# Altium PCB Receiver_PCB.PcbDoc
Units mm, origin at the board's own origin, x right, y up, seen from the top; angles counter-clockwise.
Board outline 89.03 x 91.44 mm, 2 copper layers (Top Layer, Bottom Layer), stack 1.271 mm thick; 15 components, 42 nets, 110 pads, 17 vias.
Unrouted connection lines stored in the file: 1.
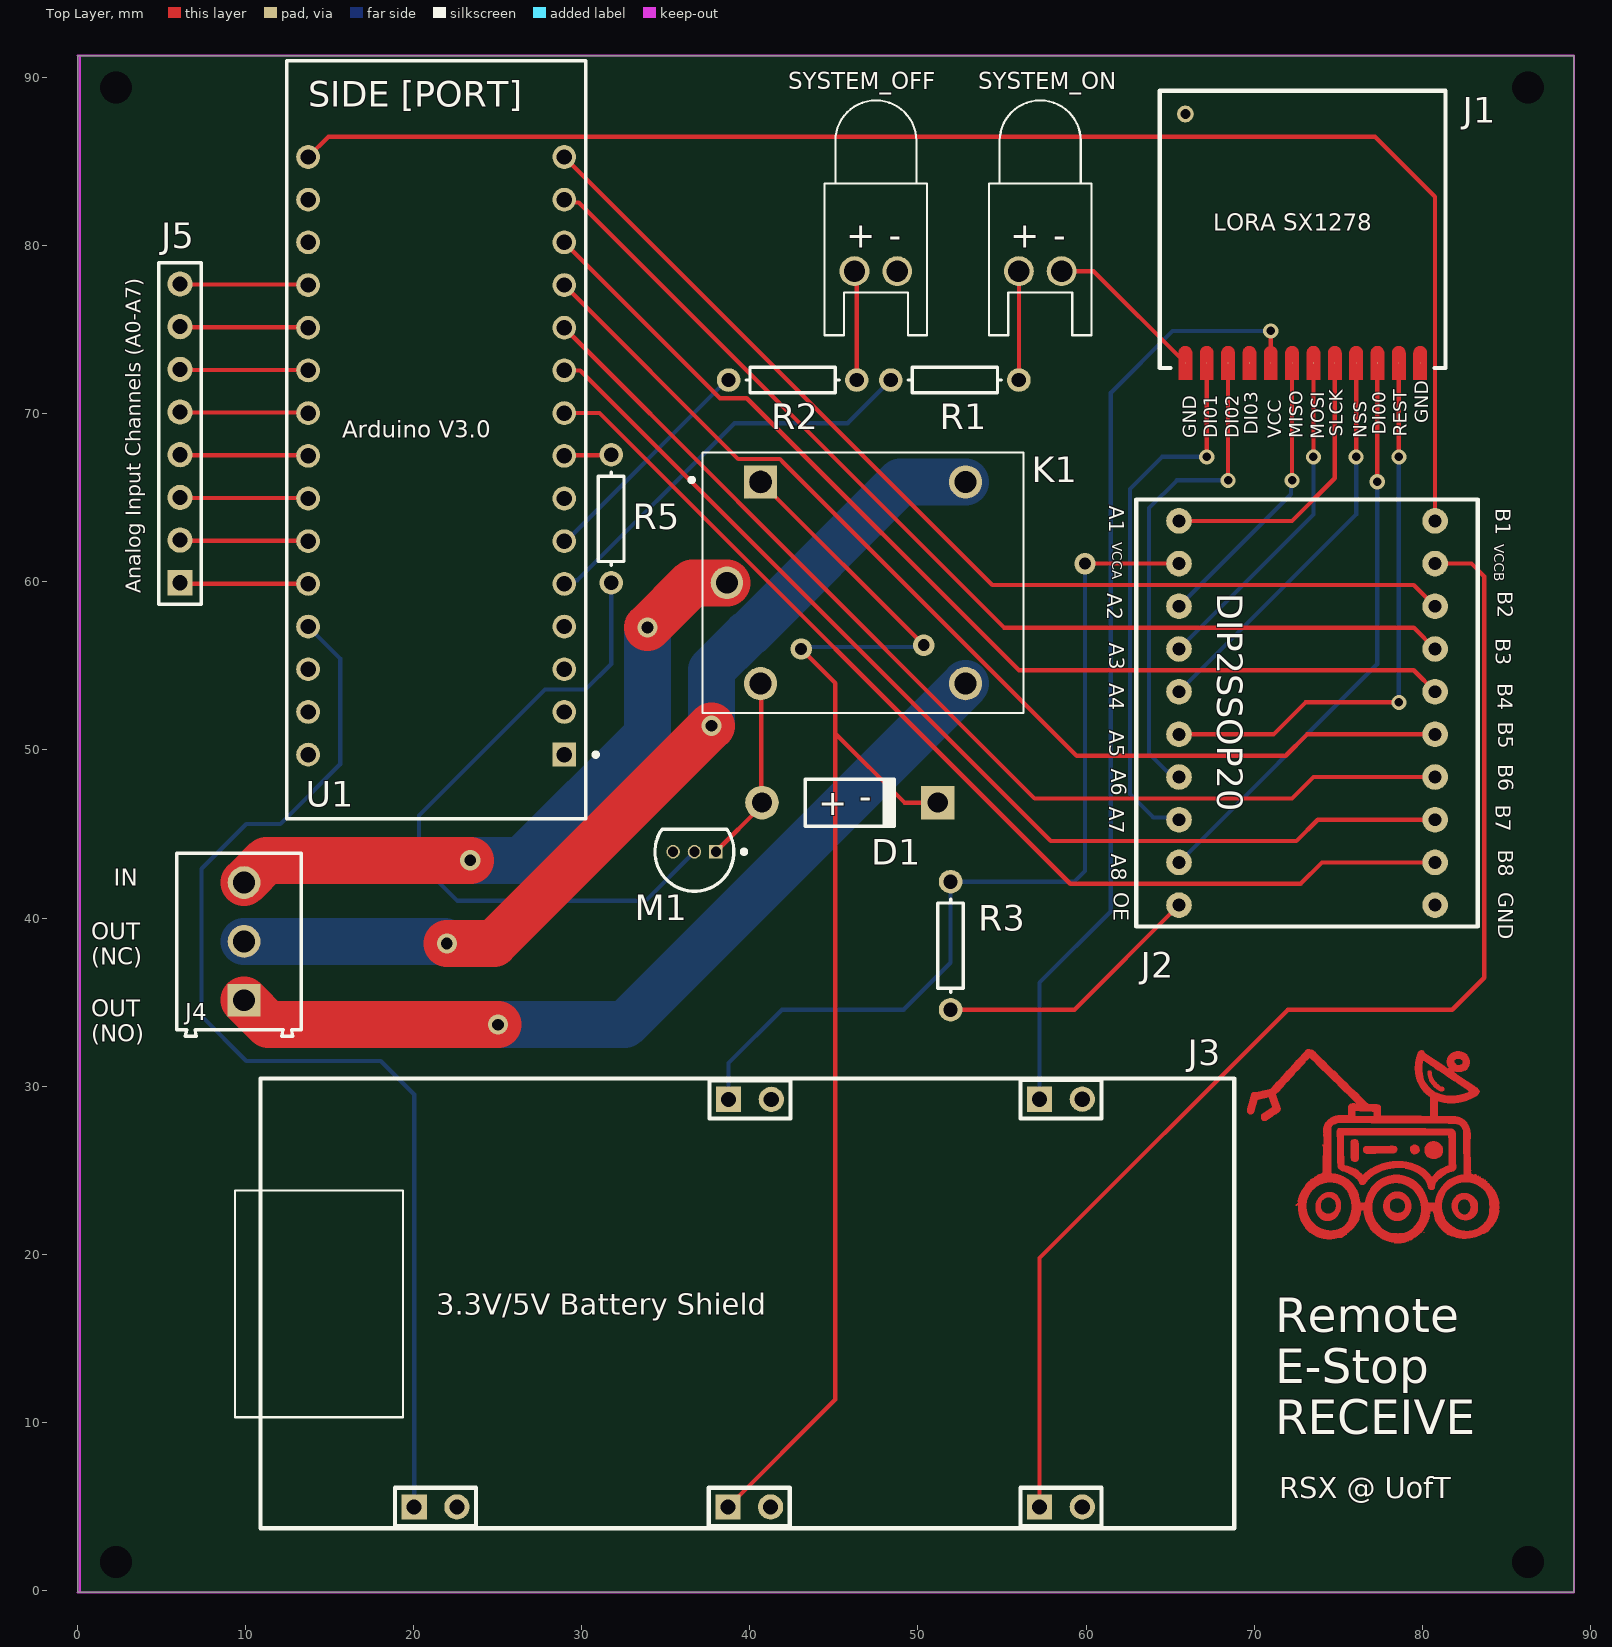
[diagram p0: Top Layer view]
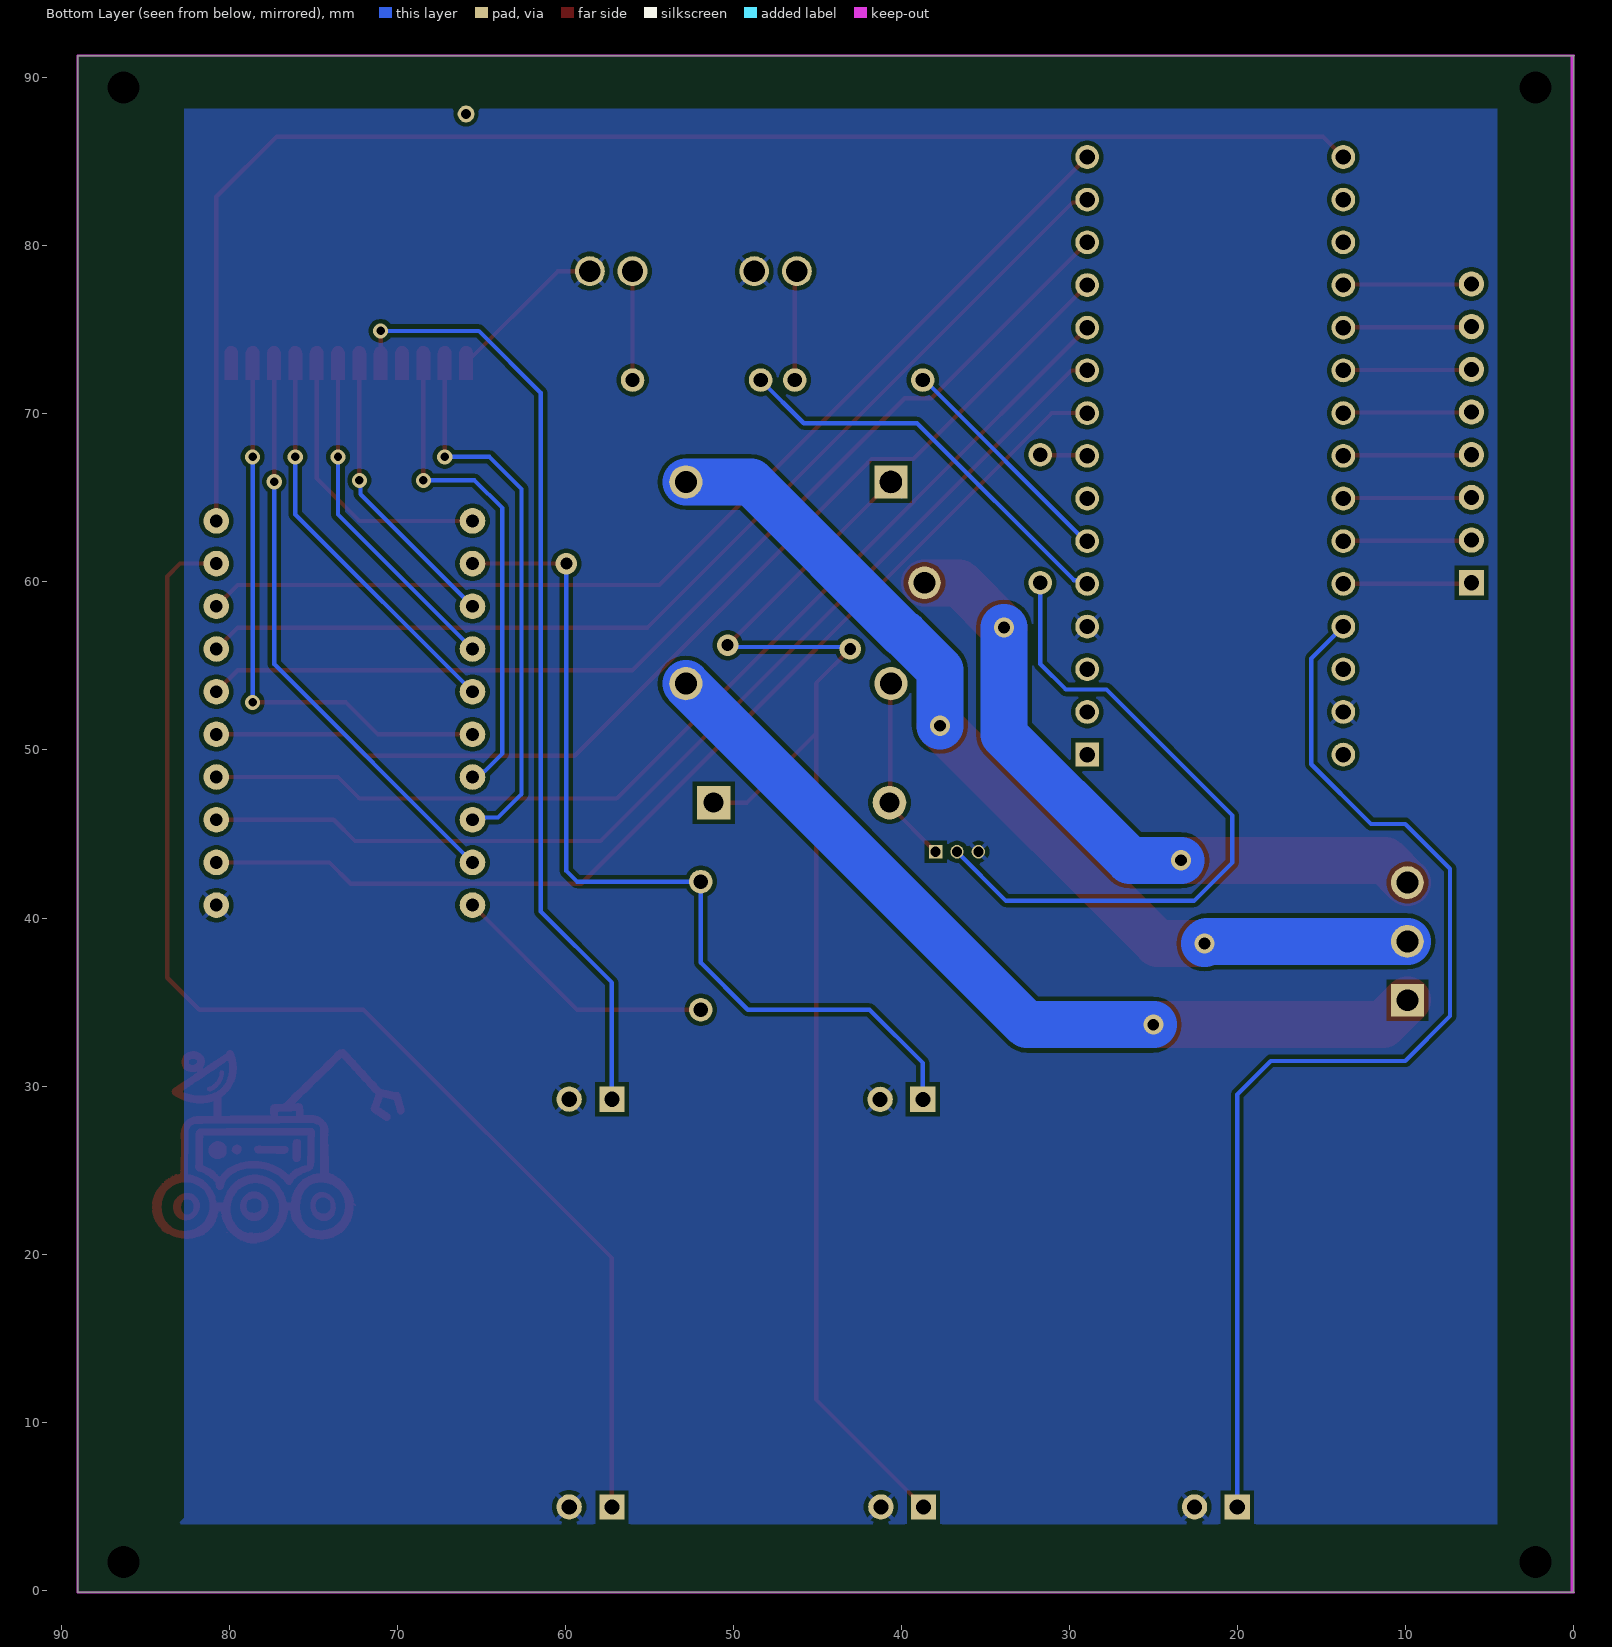
[diagram p1: Bottom Layer view, seen from below]

## Layer stack, top to bottom
Top Solder: solder mask 0.0102, Solder Resist, Dk 3.5
Top Layer: signal copper 0.0356
Dielectric 1: dielectric 1.2, FR-4, Dk 4.8
Bottom Layer: signal copper 0.0356
Bottom Solder: solder mask 0.0102, Solder Resist, Dk 3.5

## Board outline
0,-0.127 89.027,-0.127 89.027,91.313 0,91.313

## Design rules (kind name [scope] priority, off if disabled: settings)
Clearance [All] p1: gap=0.254 ignorepadtopadclearanceinfootprint=FALSE
PolygonConnect [All] p1: connectstyle=Relief reliefconductorwidth=0.254 reliefentries=4 polygonreliefangle="45 Angle" airgapwidth=0.254
RoutingVias [All] p1: holewidth=0.711 width=1.27 viastyle="Through Hole" minholewidth=0.3 minwidth=0.5 maxholewidth=0.711 maxwidth=1.27
SilkToSolderMaskClearance [IsPad] p1: minsilkscreentomaskgap=0.15 clearancetoexposedcopper=TRUE
SolderMaskExpansion [All] p1: expansion=0.102 istentingtop=FALSE
Width [All] p1: maxlimit=3 minlimit=0.254 preferedwidth=0.254
29 further rules are at their usual default settings.

## Classes and differential pairs
component class Receiver: D1 J1 J2 J3 J5 K1 M1 R1 R2 R3 R5 SR1 U1

## Components (designator, comment, footprint, x,y, rotation, side; value= is the part's Value field where it differs from the comment)
D1 "Diode 1N4007" DO-41 45.951,46.863 r0 top
J1 "Header 12" "LORA SX1278" 64.389,72.725 r0 top
J2 "Logic_Shift" DIP2SSOP20 80.772,63.627 r270 top
J3 "Header 6X2" "3.3V/5V BATTERY SHIELD" 10.882,3.692 r0 top
J4 "691214110003" 691214110003 9.606,38.608 r90 top
J5 "Header 8" HDR1X8 6.096,59.944 r90 top
K1 "SRD-05VDC-SL-C" RELAY_SRD-05VDC-SL-C 46.736,59.944 r0 top
M1 "P2N2222AG" ONSC-TO-92-3-29-11 36.703,43.942 r180 top
R1 "Res1" AXIAL-0.3 52.197,72.009 r180 top value=220
R2 "Res1" AXIAL-0.3 42.545,72.009 r180 top value=220
R3 "Res1" AXIAL-0.3 51.943,38.354 r90 top value=1K
R5 "Res1" AXIAL-0.3 31.75,63.754 r270 top value=1K
RX_SIG_1 "Green_LED" LED-0 57.277,78.486 r180 top
RX_SIG_2 "Red_LED" LED-0 47.498,78.486 r180 top
U1 "A000005" FP-A000005-MFG 21.336,68.453 r180 top

## Footprints (in the part's own frame and the unit in brackets; to place one, negate y for a bottom-side part, rotate by r counter-clockwise, add the part's x,y. Pads: shape width x height; smd on the part's side, far side on the other; paste and mask are expansions set on the pad)
"3.3V/5V BATTERY SHIELD" [mm]
  rect 1.5x1.5 hole 0.9: 1(9.144,1.27) 2(27.853,25.518) 5(27.813,1.27) 6(46.355,25.527) 9(46.355,1.27)
  round 1.5 hole 0.9: 3(11.684,1.27) 4(30.393,25.518) 7(30.353,1.27) 8(48.895,25.527) 11(48.895,1.27)
  silkscreen extent -1.52,0 57.94,26.75
691214110003 [mm] "3.50 mm Horizontal Entry Modular, 3p"
  rect 1.95x1.95 hole 1.3: 1(-3.5,-0.3)
  round 1.95 hole 1.3: 2(0,-0.3) 3(3.5,-0.3)
  silkscreen extent -5.65,-3.7 5.25,3.7, body extent -5.7,-3.7 5.25,3.7, height 8.55
AXIAL-0.3 [mm] "Axial Device, Thru-Hole; 2 Leads; 0.3 in Pin Spacing"
  round 1.4 hole 0.85: 1(-3.81,0) 2(3.81,0)
  silkscreen extent -2.77,-0.76 2.77,0.76
DIP2SSOP20 [mil]
  round 60 hole 30: 1(0,-600) 2(100,-600) 3(200,-600) 4(300,-600) 5(400,-600) 6(500,-600) 7(600,-600) 8(700,-600) 9(800,-600) 10(900,-600) 11(900,0) 12(800,0) 13(700,0) 14(600,0) 15(500,0) 16(400,0) 17(300,0) 18(200,0) 19(100,0) 20(0,0)
  silkscreen extent -50,-700 950,100
DO-41 [mm] "Diode, Axial; Body 5.2 x 2.7 mm (LxDia. max), Lead Dia. 0.86 mm (max)"
  round 2 hole 1.2: 1(-5.23,0)
  rect 2x2 hole 1.2: 2(5.23,0)
  silkscreen extent -2.65,-1.4 2.75,1.4
FP-A000005-MFG [mil]
  rect 55.67x55.67 hole 35.98 paste-39370.1 mask+0: 1(-300,737.5)
  round 55.67 hole 35.98 paste-39370.1 mask+0: 2(-300,637.5) 3(-300,537.5) 4(-300,437.5) 5(-300,337.5) 6(-300,237.5) 7(-300,137.5) 8(-300,37.5) 9(-300,-62.5) 10(-300,-162.5) 11(-300,-262.5) 12(-300,-362.5) 13(-300,-462.5) 14(-300,-562.5) 15(-300,-662.5) 16(300,-662.5) 17(300,-562.5) 18(300,-462.5) 19(300,-362.5) 20(300,-262.5) 21(300,-162.5) 22(300,-62.5) 23(300,37.5) 24(300,137.5) 25(300,237.5) 26(300,337.5) 27(300,437.5) 28(300,537.5) 29(300,637.5) 30(300,737.5)
  silkscreen extent -379,-888 350,888, body extent -354,-891 354,891, height 10
HDR1X8 [mm] "Connector; Header; 8 Position"
  rect 1.5x1.5 hole 0.9: 1(0,0)
  round 1.5 hole 0.9: 2(2.54,0) 3(5.08,0) 4(7.62,0) 5(10.16,0) 6(12.7,0) 7(15.24,0) 8(17.78,0)
  silkscreen extent -1.27,-1.27 19.05,1.27
LED-0 [mil] "LED; 2 Leads"
  round 70 hole 50: 1(50,0) 2(-50,0)
  silkscreen extent -120,-400 120,150
"LORA SX1278" [mil]
  round 1 smd: 1(610,11.81) 2(560,11.81) 3(510,11.81) 4(460,11.81) 5(410,11.81) 6(360,11.81) 7(310,11.81) 8(260,11.81) 9(210,11.81) 10(160,11.81) 11(110,11.81) 12(60,11.81)
  round 39.37 hole 23.62: ANT(60,595)
  Top Layer region: 44.25,-27.56 75.75,-27.56 75.75,35.43 74.55,41.46 71.14,46.57 66.03,49.98 60,51.18 60,51.18 53.97,49.98 48.86,46.57 45.45,41.46 44.25,35.43 44.25,35.43
  Top Layer region: 144.25,-27.56 175.75,-27.56 175.75,35.43 174.55,41.46 171.14,46.57 166.03,49.98 160,51.18 160,51.18 153.97,49.98 148.86,46.57 145.45,41.46 144.25,35.43 144.25,35.43
  Top Layer region: 94.25,-27.56 125.75,-27.56 125.75,35.43 124.55,41.46 121.14,46.57 116.03,49.98 110,51.18 110,51.18 103.97,49.98 98.86,46.57 95.45,41.46 94.25,35.43 94.25,35.43
  Top Layer region: 544.25,-27.56 575.75,-27.56 575.75,35.43 574.55,41.46 571.14,46.57 566.03,49.98 560,51.18 560,51.18 553.97,49.98 548.86,46.57 545.45,41.46 544.25,35.43 544.25,35.43
  Top Layer region: 494.25,-27.56 525.75,-27.56 525.75,35.43 524.55,41.46 521.14,46.57 516.03,49.98 510,51.18 510,51.18 503.97,49.98 498.86,46.57 495.45,41.46 494.25,35.43 494.25,35.43
  Top Layer region: 444.25,-27.56 475.75,-27.56 475.75,35.43 474.55,41.46 471.14,46.57 466.03,49.98 460,51.18 460,51.18 453.97,49.98 448.86,46.57 445.45,41.46 444.25,35.43 444.25,35.43
  Top Layer region: 394.25,-27.56 425.75,-27.56 425.75,35.43 424.55,41.46 421.14,46.57 416.03,49.98 410,51.18 410,51.18 403.97,49.98 398.86,46.57 395.45,41.46 394.25,35.43 394.25,35.43
  Top Layer region: 344.25,-27.56 375.75,-27.56 375.75,35.43 374.55,41.46 371.14,46.57 366.03,49.98 360,51.18 360,51.18 353.97,49.98 348.86,46.57 345.45,41.46 344.25,35.43 344.25,35.43
  Top Layer region: 294.25,-27.56 325.75,-27.56 325.75,35.43 324.55,41.46 321.14,46.57 316.03,49.98 310,51.18 310,51.18 303.97,49.98 298.86,46.57 295.45,41.46 294.25,35.43 294.25,35.43
  Top Layer region: 244.25,-27.56 275.75,-27.56 275.75,35.43 274.55,41.46 271.14,46.57 266.03,49.98 260,51.18 260,51.18 253.97,49.98 248.86,46.57 245.45,41.46 244.25,35.43 244.25,35.43
  Top Layer region: 194.25,-27.56 225.75,-27.56 225.75,35.43 224.55,41.46 221.14,46.57 216.03,49.98 210,51.18 210,51.18 203.97,49.98 198.86,46.57 195.45,41.46 194.25,35.43 194.25,35.43
  Top Layer region: 594.25,-27.56 625.75,-27.56 625.75,35.43 624.55,41.46 621.14,46.57 616.03,49.98 610,51.18 610,51.18 603.97,49.98 598.86,46.57 595.45,41.46 594.25,35.43 594.25,35.43
  silkscreen extent 0,0 669,650
ONSC-TO-92-3-29-11 [mm] "TO, 3-Leads, Body Dia 4.7mm, Pitch 1.27mm"
  rect 0.8x0.8 hole 0.6: 1(-1.27,0)
  round 0.8 hole 0.6 paste+0: 2(0,0)
  round 0.8 hole 0.6: 3(1.27,0)
  silkscreen extent -3.08,-1.34 2.35,2.35, body extent -2.35,-1.33 2.36,2.36, height 7.87
RELAY_SRD-05VDC-SL-C [mm]
  rect 1.98x1.98 hole 1.32 paste+0: A1(-6.1,6)
  round 1.98 hole 1.32: A2(-6.1,-6) NC(6.1,6) NO(6.1,-6)
  round 1.935 hole 1.29: COM(-8.1,0)
  silkscreen extent -10.3,-7.75 9.55,7.75, body extent -9.6,-7.8 9.6,7.8, height 15.8

## Part data
D1: "1 Amp General Purpose Rectifier", Code_JEDEC=DO-204-AL, ComponentLink1Description="Manufacturer Link", ComponentLink1URL=http://www.fairchildsemi.com/, ComponentLink2Description=Datasheet, ComponentLink2URL=http://www.fairchildsemi.com/ds/1N%2F1N4001.pdf, DatasheetVersion=1998, LatestRevisionDate=17-Jul-2002, LatestRevisionNote="Re-released for DXP Platform.", PackageDescription="Diode, Axial; Body 5.2 x 2.7 mm (LxDia. max), Lead Dia. 0.86 mm (max)", PackageReference=DO-41, PackageVersion=Aug-1999, Published=8-Jun-2000, Publisher="Altium Limited"
J1: "Header, 12-Pin", LatestRevisionDate=17-Jul-2002, LatestRevisionNote="Re-released for DXP Platform.", Publisher="Altium Limited"
J2: library part "Header 10X2", "Header, 10-Pin, Dual row", LatestRevisionDate=17-Jul-2002, LatestRevisionNote="Re-released for DXP Platform.", Publisher="Altium Limited"
J3: "Header, 6-Pin, Dual row", LatestRevisionDate=17-Jul-2002, LatestRevisionNote="Re-released for DXP Platform.", Publisher="Altium Limited"
J4: library part CMP-1502-02466-1, "Serie 2141 - 3.50 mm Horizontal Entry Modular with Rising Cage Clamp WR-TBL, 3 pin", Manufacturer="Wurth Elektronik", Operating Temperature=-40to105degC, Datasheet URL=http://katalog.we-online.de/em/datasheet/6912141100xx.pdf, Manufacturer URL=http://www.we-online.de, Mounting Technology=THT, Package Reference=691214110003, Packaging=Box, Part Number=691214110003, Pin Number=3, Pitch=3.50mm, Publisher=WurthElektronik
J5: "Header, 8-Pin", LatestRevisionDate=17-Jul-2002, LatestRevisionNote="Re-released for DXP Platform.", Publisher="Altium Limited"
K1: "5V Trigger Relay Module For Arduino And Raspberry Pi 5V Trigger Relay Module For Arduino And Raspberry Pi", Package="NON STANDARD-5 Songle Relay", Availability="Not in stock", Check_prices=https://www.snapeda.com/parts/SRD-05VDC-SL-C/Songle+Relay/view-part/?ref=eda, MF="Songle Relay", MP=SRD-05VDC-SL-C, Price=None, SnapEDA_Link=https://www.snapeda.com/parts/SRD-05VDC-SL-C/Songle+Relay/view-part/?ref=snap
M1: library part CMP-1048-01402-1, "Amplifier Transistor, NPN Silicon, 3-Pin TO-92, Pb-Free, Bulk Box", Manufacturer="On Semiconductor", ComponentLink1Description="Manufacturer URL", ComponentLink1URL=http://www.onsemi.com/, ComponentLink2Description=Datasheet, ComponentLink2URL=http://www.onsemi.com/pub_link/Collateral/P2N2222A-D.PDF, ComponentLink3Description="Package Specification", ComponentLink3URL=http://www.onsemi.cn/pub_link/Collateral/2N6426-D.PDF, DatasheetVersion="Rev. 7", fT Min (MHz)=300, IC Continuous (A)=0.6, Mounting Technology="Through Hole", PackageDescription="3-Pin Transistor Outline, Body 4.825 x 3.685 mm, Pitch 1.27 mm", PackageReference=TO-92-3-29-11_AM_SL, PackageVersion="Rev. AM", Packing="Bulk Box", PartNumber=P2N2222AG, Polarity=NPN, RoHS=TRUE
R1 R2 R3 R5: "Resistor", LatestRevisionDate=17-Jul-2002, LatestRevisionNote="Re-released for DXP Platform.", PackageDescription="Axial Device, Thru-Hole; 2 Leads; 0.3 in Pin Spacing", PackageReference=AXIAL-0.3, Published=8-Jun-2000, Publisher="Altium Limited"
RX_SIG_1 RX_SIG_2: library part LED0, "Typical INFRARED GaAs LED", LatestRevisionDate=08-Jul-2005, LatestRevisionNote="Mech Layer 1 removed.", PackageDescription="LED; 2 Leads", PackageReference=LED-0, Published=8-Jun-2000, Publisher="Altium Limited"
U1: library part CMP-189986-000002-1, "ARDUINO NANO ATMEGA328 EVAL BRD", Operating Supply Voltage=12V, Package Quantity=50, Core Architecture=AVR, Data Bus Width=8b, Evaluation Kit=Yes, Height=0.25inch, Interface=I2C, Length=7inch, Number of Bits=8, Packaging=Bulk, REACH SVHC="No SVHC", Series="AVR® ATmega", Weight=0.358383oz, Width=5inch

## Free pads (board coordinates)
  round 1.524 hole 1.9: 1(2.286,89.408) 2(86.286,89.408) 3(2.286,1.687) 4(86.286,1.687)

## Via types
v1: diameter 0.9, hole 0.5, Top Layer to Bottom Layer, 9 vias
v2: diameter 1.2, hole 0.7, Top Layer to Bottom Layer, 5 vias
v3: diameter 1.27, hole 0.711, Top Layer to Bottom Layer, 3 vias

## Nets (pads, with @x,y where several pads share a name; then routed paths per layer and width w, separated by ;. In a path a pad name is that pad's centre, name@x,y a point inside that pad or via, vN(x,y) a via of type N, cw(c..) or ccw(c..) an arc to the next point about the centre after c; other vN are vias at no path point)
DI03: J1.9
GND: J1.1 J1.12 J2.11 J3.3 J3.4 J3.7 J3.8 J3.11 M1.3 RX_SIG_1.2 RX_SIG_2.2 U1.4 U1.29 | length 10.2
  Top Layer w0.254: RX_SIG_1.2 60.452,78.486 J1.12 ; J1.1 79.883,73.616
NetD1_1: D1.1 K1.A2 M1.1 | length 11.2
  Top Layer w0.254: M1.1 40.721,46.69 D1.1 40.678,46.905 40.678,53.902 K1.A2
NetD1_2: D1.2 J3.5 K1.A1 | length 84.5
  Top Layer w0.254: J3.5 45.085,11.352 45.085,50.973 ; K1.A1 v3(50.346,56.234) ; v3(43.053,56.007) 45.085,53.975 45.085,50.973 ; D1.2 49.195,46.863 45.085,50.973
  Bottom Layer w0.254: K1.A1@39.984,65.081 K1.A1 ; v3(43.053,56.007) 43.166,56.12 50.233,56.12 v3(50.346,56.234)
NetJ1_2: J1.2 J2.6 | length 34.1
  Top Layer w0.254: J2.6 71.154,50.927 73.059,52.832 v1(78.613,52.832) ; v1(78.613,67.437) J1.2
  Bottom Layer w0.254: v1(78.613,52.832) v1(78.613,67.437)
NetJ1_3: J1.3 J2.9 | length 34.6
  Top Layer w0.254: v1(77.329,65.959) 77.329,73.011 J1.3
  Bottom Layer w0.254: J2.9 77.329,55.104 v1(77.329,65.959)
NetJ1_4: J1.4 J2.5 | length 23.9
  Top Layer w0.254: v1(76.073,67.437) J1.4
  Bottom Layer w0.254: J2.5 76.073,64.008 v1(76.073,67.437)
NetJ1_5: J1.5 J2.1 | length 17.2
  Top Layer w0.254: J2.1 72.263,63.627 74.803,66.167 J1.5
NetJ1_6: J1.6 J2.4 | length 20.3
  Top Layer w0.254: v1(73.533,67.437) J1.6
  Bottom Layer w0.254: J2.4 73.533,64.008 v1(73.533,67.437)
NetJ1_7: J1.7 J2.3 | length 17.3
  Top Layer w0.254: v1(72.263,66.04) J1.7
  Bottom Layer w0.254: J2.3 72.194,65.209 72.194,65.971 v1(72.263,66.04)
NetJ1_8: J1.8 J3.6 | length 56.7
  Top Layer w0.254: J1.8 v1(70.993,74.93)
  Bottom Layer w0.254: J3.6 57.237,36.155 61.468,40.386 61.468,71.247 65.151,74.93 v1(70.993,74.93)
NetJ1_10: J1.10 J2.7 | length 29.3
  Top Layer w0.254: v1(68.453,66.04) J1.10
  Bottom Layer w0.254: J2.7 65.188,48.387 64.825,48.751 64.787,48.751 63.754,49.784 63.754,64.389 65.405,66.04 v1(68.453,66.04)
NetJ1_11: J1.11 J2.8 | length 32.7
  Top Layer w0.254: v1(67.183,67.437) J1.11
  Bottom Layer w0.254: J2.8 65.405,45.974 64.008,45.974 62.611,47.371 62.611,65.532 64.516,67.437 v1(67.183,67.437)
NetJ2_2: J2.2 J3.2 R3.2 | length 54.8
  Top Layer w0.254: v3(59.944,61.087) J2.2
  Bottom Layer w0.254: J3.2 38.735,31.369 41.91,34.544 49.149,34.544 51.943,37.338 R3.2 59.309,42.164 59.944,42.799 v3(59.944,61.087)
NetJ2_10: J2.10 R3.1 | length 16.2
  Top Layer w0.254: R3.1 59.309,34.544 J2.10
NetJ2_12: J2.12 U1.9 | length 63.9
  Top Layer w0.254: U1.9 31.058,70.04 59.062,42.037 72.771,42.037 74.041,43.307 J2.12
NetJ2_13: J2.13 U1.10 | length 63.9
  Top Layer w0.254: U1.10 29.903,72.581 57.907,44.577 72.517,44.577 73.787,45.847 J2.13
NetJ2_14: J2.14 U1.11 | length 64
  Top Layer w0.254: U1.11 39.265,64.812 39.265,64.796 56.944,47.117 72.263,47.117 73.533,48.387 J2.14
NetJ2_15: J2.15 U1.12 | length 63.9
  Top Layer w0.254: U1.12 39.302,67.315 41.784,67.315 42.007,67.092 59.442,49.657 71.882,49.657 73.152,50.927 J2.15
NetJ2_16: J2.16 U1.13 | length 62.9
  Top Layer w0.254: U1.13 38.229,70.928 39.816,70.928 56.007,54.737 79.502,54.737 J2.16
NetJ2_17: J2.17 U1.14 | length 62.9
  Top Layer w0.254: U1.14 29.122,82.574 29.821,82.574 55.118,57.277 79.502,57.277 J2.17
NetJ2_18: J2.18 U1.15 | length 62.9
  Top Layer w0.254: U1.15 54.419,59.817 79.502,59.817 J2.18
NetJ2_19: J2.19 J3.9 | length 75.5
  Top Layer w0.254: J3.9 57.237,19.772 72.009,34.544 81.788,34.544 83.693,36.449 83.693,60.325 82.931,61.087 J2.19 J2.19@80.915,60.944
NetJ2_20: J2.20 U1.16 | length 88.3
  Top Layer w0.254: U1.16 14.922,86.487 77.194,86.487 80.772,82.909 J2.20
NetJ3_1: J3.1 U1.27 | length 67.7
  Bottom Layer w0.254: U1.27 15.621,55.435 15.621,49.149 12.065,45.593 10.033,45.593 7.366,42.926 7.366,34.163 10.033,31.496 18.034,31.496 20.026,29.504 J3.1
NetJ4_1: J4.1 K1.NO | length 51.9
  Top Layer w2.8: J4.1 11.359,33.655 v2(25.019,33.655)
  Bottom Layer w2.8: v2(25.019,33.655) 32.547,33.655 K1.NO
NetJ4_2: J4.2 K1.NC | length 57.6
  Top Layer w2.8: v2(21.971,38.481) 24.765,38.481 v2(37.719,51.435)
  Bottom Layer w0.254: 51.593,65.944 K1.NC
  Bottom Layer w2.8: J4.2 21.844,38.608 v2(21.971,38.481) ; v2(37.719,51.435) 37.719,54.766 39.843,56.89 39.901,56.89 48.955,65.944 K1.NC
NetJ4_3: J4.3 K1.COM | length 39.8
  Top Layer w2.8: J4.3 11.232,43.434 v2(23.368,43.434) ; v2(33.909,57.277) 36.576,59.944 K1.COM
  Bottom Layer w2.8: v2(23.368,43.434) 26.423,43.434 33.909,50.92 v2(33.909,57.277)
NetJ5_1: J5.1 U1.26 | length 7.6
  Top Layer w0.254: J5.1 6.159,59.88 U1.26
NetJ5_2: J5.2 U1.25 | length 7.6
  Top Layer w0.254: J5.2 6.128,62.452 13.684,62.452 U1.25
NetJ5_3: J5.3 U1.24 | length 7.6
  Top Layer w0.254: J5.3 6.128,64.992 13.684,64.992 U1.24
NetJ5_4: J5.4 U1.23 | length 7.6
  Top Layer w0.254: J5.4 6.128,67.532 13.684,67.532 U1.23
NetJ5_5: J5.5 U1.22 | length 7.6
  Top Layer w0.254: J5.5 6.128,70.072 13.684,70.072 U1.22
NetJ5_6: J5.6 U1.21 | length 7.6
  Top Layer w0.254: J5.6 6.128,72.612 13.684,72.612 U1.21
NetJ5_7: J5.7 U1.20 | length 7.6
  Top Layer w0.254: J5.7 6.128,75.152 13.684,75.152 U1.20
NetJ5_8: J5.8 U1.19 | length 7.6
  Top Layer w0.254: J5.8 6.128,77.692 13.684,77.692 U1.19
NetM1_2: M1.2 R5.2 | length 41.3
  Bottom Layer w0.254: R5.2 31.75,55.118 30.226,53.594 27.813,53.594 20.32,46.101 20.32,43.307 22.606,41.021 33.782,41.021 M1.2
NetR1_1: R1.1 RX_SIG_1.1 | length 6.5
  Top Layer w0.254: R1.1 RX_SIG_1.1
NetR1_2: R1.2 U1.5 | length 24.5
  Bottom Layer w0.254: U1.5 29.178,60.102 29.749,60.102 39.088,69.441 45.819,69.441 R1.2
NetR2_1: R2.1 RX_SIG_2.1 | length 6.5
  Top Layer w0.254: RX_SIG_2.1 46.355,78.359 R2.1
NetR2_2: R2.2 U1.6 | length 14.1
  Top Layer w0.254: U1.6 U1.6@28.956,62.516 ; R2.2@38.354,71.914 R2.2@38.354,72.009
  Bottom Layer w0.254: U1.6@28.956,62.516 U1.6 29.051,62.42 38.64,72.009 R2.2 ; R2.2@38.354,71.914 R2.2@38.354,72.009
NetR5_1: R5.1 U1.8 | length 2.8
  Top Layer w0.254: U1.8 28.988,67.532 31.718,67.532 R5.1
pads on no net: J1.ANT U1.1 U1.2 U1.3 U1.7 U1.17 U1.18 U1.28 U1.30

## Polygon pours and split planes (outlines as drawn)
GND on Bottom Layer "BOTTOM_LAYER_GND_P000" (solid, pour order 0): 4.572,88.138 82.677,88.138 82.677,4.318 83.058,3.937 4.572,3.937

## Keep-outs
Keep-Out Layer:
  lines w0.127: 0.127,-0.127 0.127,91.313 ; 89.027,-0.127 0,-0.127 89.027,-0.127 ; 89.027,-0.127 89.027,91.313 ; 89.027,-0.127 89.027,91.313 ; 89.027,91.313 0,91.313 89.027,91.313

## Other copper
Top Layer:
  region: 83.608,24.5 83.608,24.528 83.636,24.528 83.636,24.5
  region: 75.504,21.145 75.476,21.145 75.476,21.173 75.504,21.173
  region: 83.38,24.67 83.38,24.642 83.352,24.642 83.352,24.67
  region: 83.181,24.727 83.124,24.727 83.124,24.756 83.181,24.756
  region: 80.11,21.287 80.11,21.315 80.139,21.315 80.139,21.287
  region: 83.238,24.699 83.21,24.699 83.21,24.727 83.238,24.727
  region: 83.778,24.414 83.778,24.386 83.75,24.386 83.75,24.414
  region: 81.092,29.731 81.007,29.731 81.007,29.76 80.95,29.76 80.95,29.788 80.921,29.788 80.921,29.817 80.864,29.817 80.864,29.845 80.836,29.845 80.836,29.873 80.808,29.873 80.808,29.902 80.751,29.902 80.751,29.93 80.722,29.93 80.722,29.959 80.694,29.959 80.694,29.987 80.665,29.987 80.665,30.044 80.637,30.044 80.637,30.072 80.608,30.072 80.608,30.101 80.58,30.101 80.58,30.129 80.552,30.129 80.552,30.186 80.523,30.186 80.523,30.215 80.495,30.215 80.495,30.271 80.466,30.271 80.466,30.328 80.438,30.328 80.438,30.385 80.409,30.385 80.409,30.442 80.381,30.442 80.381,30.527 80.353,30.527 80.353,30.641 80.324,30.641 80.324,30.869 80.353,30.869 80.353,30.897 80.381,30.897 80.381,30.925 80.523,30.925 80.523,30.897 80.552,30.897 80.552,30.812 80.58,30.812 80.58,30.613 80.608,30.613 80.608,30.527 80.637,30.527 80.637,30.471 80.665,30.471 80.665,30.414 80.694,30.414 80.694,30.357 80.722,30.357 80.722,30.328 80.751,30.328 80.751,30.271 80.779,30.271 80.779,30.243 80.808,30.243 80.808,30.215 80.836,30.215 80.836,30.186 80.864,30.186 80.864,30.129 80.893,30.129 80.893,30.101 80.95,30.101 80.95,30.072 80.978,30.072 80.978,30.044 81.007,30.044 81.007,30.016 81.035,30.016 81.035,29.987 81.092,29.987 81.092,29.959 81.234,29.959 81.234,29.93 81.291,29.93 81.291,29.873 81.319,29.873 81.319,29.76 81.291,29.76 81.291,29.731 81.234,29.731 81.234,29.703 81.092,29.703
  region: 76.073,25.495 75.931,25.495 75.931,25.523 75.874,25.523 75.874,25.552 75.817,25.552 75.817,25.58 75.789,25.58 75.789,25.694 75.76,25.694 75.76,26.717 75.789,26.717 75.789,26.774 75.817,26.774 75.817,26.803 75.931,26.803 75.931,26.831 76.045,26.831 76.045,26.803 76.13,26.803 76.13,26.774 76.158,26.774 76.158,26.717 76.187,26.717 76.187,26.604 76.215,26.604 76.215,25.637 76.187,25.637 76.187,25.58 76.158,25.58 76.158,25.552 76.13,25.552 76.13,25.523 76.073,25.523
  region: 77.21,25.978 76.67,25.978 76.67,26.007 76.613,26.007 76.613,26.035 76.556,26.035 76.556,26.063 76.528,26.063 76.528,26.12 76.499,26.12 76.499,26.291 76.528,26.291 76.528,26.348 76.556,26.348 76.556,26.376 76.613,26.376 76.613,26.405 76.699,26.405 76.699,26.433 78.092,26.433 78.092,26.461 78.291,26.461 78.291,26.433 78.404,26.433 78.404,26.405 78.433,26.405 78.433,26.376 78.461,26.376 78.461,26.348 78.49,26.348 78.49,26.291 78.518,26.291 78.518,26.177 78.49,26.177 78.49,26.12 78.461,26.12 78.461,26.063 78.404,26.063 78.404,26.035 78.348,26.035 78.348,26.007 77.239,26.007 77.239,25.978
  region: 79.769,26.405 79.769,26.376 79.798,26.376 79.798,26.319 79.826,26.319 79.826,26.206 79.855,26.206 79.855,26.149 79.826,26.149 79.826,26.092 79.798,26.092 79.798,26.063 79.769,26.063 79.769,26.035 79.741,26.035 79.741,26.007 79.684,26.007 79.684,25.978 79.599,25.978 79.599,25.95 79.485,25.95 79.485,25.978 79.428,25.978 79.428,26.007 79.371,26.007 79.371,26.035 79.343,26.035 79.343,26.092 79.314,26.092 79.314,26.149 79.286,26.149 79.286,26.348 79.314,26.348 79.314,26.405 79.343,26.405 79.343,26.433 79.371,26.433 79.371,26.461 79.428,26.461 79.428,26.49 79.485,26.49 79.485,26.518 79.627,26.518 79.627,26.49 79.684,26.49 79.684,26.461 79.741,26.461 79.741,26.433 79.769,26.433
  region: 80.338,26.575 80.338,26.604 80.366,26.604 80.366,26.632 80.423,26.632 80.423,26.661 80.48,26.661 80.48,26.689 80.594,26.689 80.594,26.717 80.764,26.717 80.764,26.689 80.878,26.689 80.878,26.661 80.935,26.661 80.935,26.632 80.992,26.632 80.992,26.604 81.02,26.604 81.02,26.575 81.049,26.575 81.049,26.547 81.077,26.547 81.077,26.518 81.106,26.518 81.106,26.49 81.134,26.49 81.134,26.433 81.162,26.433 81.162,26.405 81.191,26.405 81.191,26.319 81.219,26.319 81.219,26.035 81.191,26.035 81.191,25.95 81.162,25.95 81.162,25.893 81.134,25.893 81.134,25.864 81.106,25.864 81.106,25.836 81.077,25.836 81.077,25.808 81.049,25.808 81.049,25.779 81.02,25.779 81.02,25.751 80.963,25.751 80.963,25.722 80.907,25.722 80.907,25.694 80.85,25.694 80.85,25.665 80.565,25.665 80.565,25.694 80.48,25.694 80.48,25.722 80.423,25.722 80.423,25.751 80.395,25.751 80.395,25.779 80.338,25.779 80.338,25.808 80.309,25.808 80.309,25.836 80.281,25.836 80.281,25.864 80.253,25.864 80.253,25.921 80.224,25.921 80.224,25.978 80.196,25.978 80.196,26.035 80.167,26.035 80.167,26.348 80.196,26.348 80.196,26.433 80.224,26.433 80.224,26.461 80.253,26.461 80.253,26.518 80.281,26.518 80.281,26.547 80.309,26.547 80.309,26.575
  region: 133 vertices and 1 holes, not listed, extent 73.656,21.998 75.163,23.675
  region: 141 vertices and 1 holes, not listed, extent 77.694,21.998 79.343,23.704
  region: 131 vertices and 1 holes, not listed, extent 81.76,22.026 83.323,23.618
  region: 301 vertices and 1 holes, not listed, extent 74.907,23.846 82.015,27.485
  region: 2160 vertices and 7 holes, not listed, extent 69.59,20.661 84.574,32.176

## Silkscreen, mask and mechanical layers (free items; w line width, h text height)
Top Overlay:
  text "SYSTEM_OFF" at 42.291,89.321 h1
  text "SYSTEM_ON" at 53.594,89.321 h1
  text "SIDE [PORT]" at 13.716,88.265 h1.52
  text "LORA SX1278" at 67.564,80.899 h1
  text "+" at 45.72,79.883 h1.52
  text "-" at 48.26,79.883 h1.52
  text "+" at 55.499,79.883 h1.52
  text "-" at 58.039,79.883 h1.52
  text "Arduino V3.0" at 15.748,68.58 h1
  text "Analog Input Channels (A0-A7)" at 4.064,59.309 h1.52 r90
  text "-" at 47.244,47.625 h1.52 r180
  text "+" at 44.069,46.101 h1.52
  text "IN" at 2.159,41.91 h1
  text "OUT  / (NC)" at 0.812,37.211 h1
  text "OUT  / (NO)" at 0.812,32.639 h1
  text "3.3V/5V Battery Shield" at 21.336,16.383 h1.27
  text "Remote  / E-Stop / RECEIVE" at 71.247,9.271 h2.03
  text "RSX @ UofT" at 71.501,5.461 h1.27

## Text inside footprints (layer, text, board x,y; h text height)
J1: Top Overlay "DI01" at 67.818,68.534 h0.8 r90; Top Overlay "MOSI" at 74.168,68.489 h0.8 r90; Top Overlay "NSS" at 76.708,68.534 h0.8 r90; Top Overlay "DI02" at 69.088,68.534 h0.8 r90; Top Overlay "MISO" at 72.898,68.534 h0.8 r90; Top Overlay "VCC" at 71.628,68.534 h0.8 r90; Top Overlay "GND" at 66.548,68.534 h0.8 r90; Top Overlay "SLCK" at 75.288,68.627 h0.8 r90; Top Overlay "REST" at 79.098,68.627 h0.8 r90; Top Overlay "DI03" at 70.208,68.76 h0.8 r90; Top Overlay "DI00" at 77.828,68.76 h0.8 r90; Top Overlay "GND" at 80.368,69.426 h0.8 r90
J2: Top Overlay "DIP2SSOP20" at 67.818,59.309 h1.52 r270; Top Overlay "VCCB" at 84.085,62.23 h1.02 r270; Top Overlay "GND" at 84.218,41.529 h1.52 r270; Top Overlay "OE" at 61.341,41.529 h1.52 r270; Top Overlay "VCCA" at 61.341,62.358 h1.02 r270; Top Overlay "B2" at 84.201,59.436 h1.52 r270; Top Overlay "B8" at 84.218,44.069 h1.52 r270; Top Overlay "B7" at 84.074,46.736 h1.52 r270; Top Overlay "B6" at 84.218,49.149 h1.52 r270; Top Overlay "B5" at 84.218,51.689 h1.52 r270; Top Overlay "B4" at 84.201,53.975 h1.52 r270; Top Overlay "B3" at 84.091,56.642 h1.52 r270; Top Overlay "A1" at 61.087,64.516 h1.52 r270; Top Overlay "A2" at 60.96,59.309 h1.52 r270; Top Overlay "A3" at 61.087,56.388 h1.52 r270; Top Overlay "A4" at 61.087,53.975 h1.52 r270; Top Overlay "A5" at 61.087,51.181 h1.52 r270; Top Overlay "A6" at 61.214,48.895 h1.52 r270; Top Overlay "A7" at 61.087,46.609 h1.52 r270; Top Overlay "A8" at 61.214,43.815 h1.52 r270; Top Overlay "B1" at 84.074,64.389 h1.52 r270